# EAGLE board VGA Blinken (EAGLE 7.6.0)
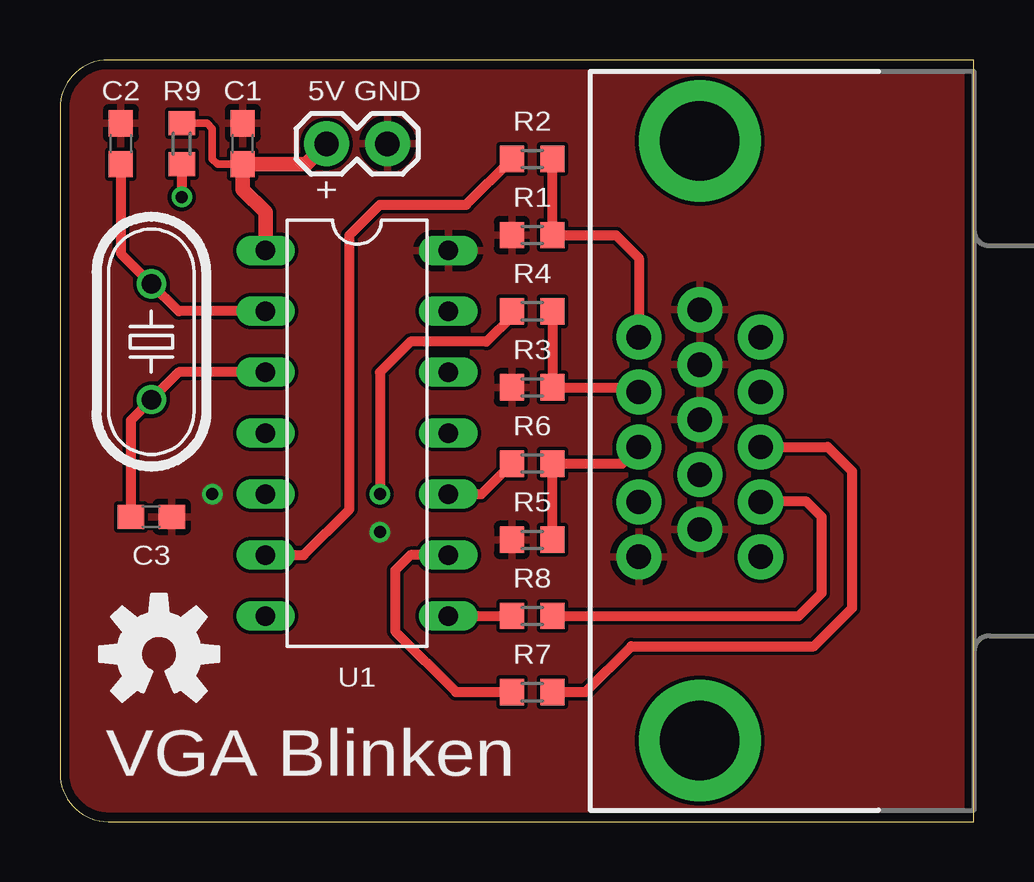
[diagram p0: board, top side]
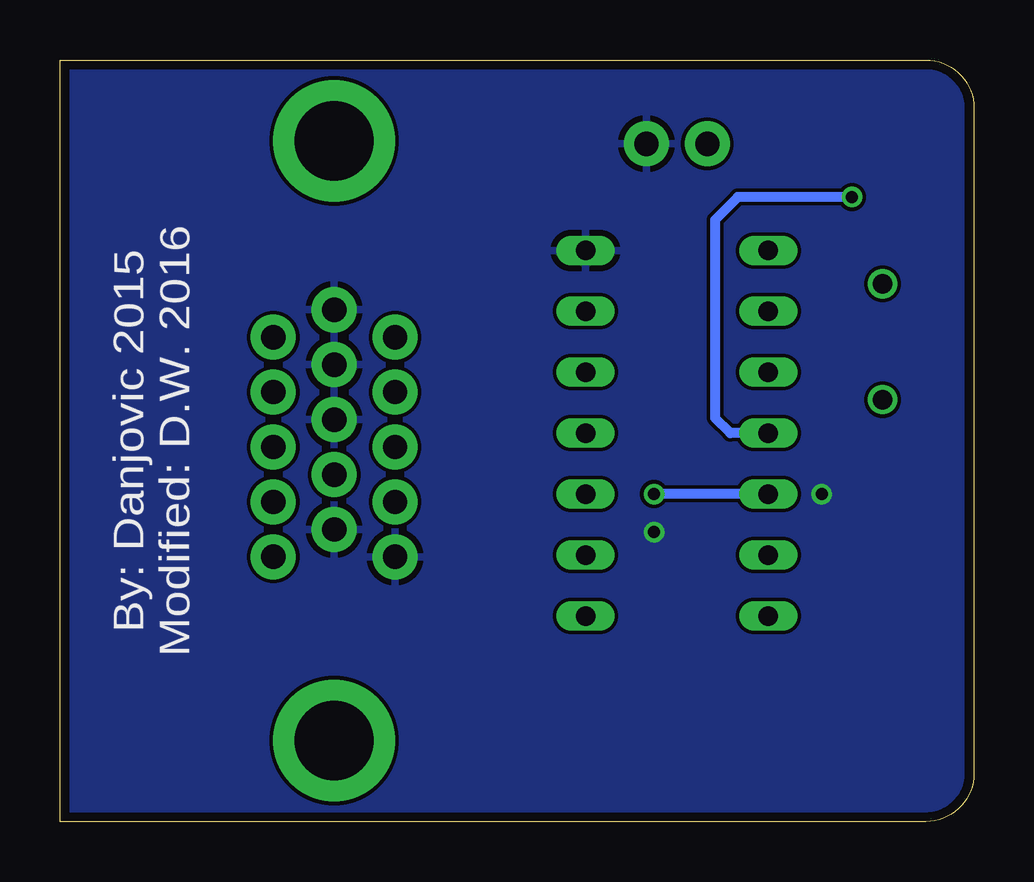
[diagram p1: board, bottom side, seen from below]

Size 38.1 x 31.75 mm. Coordinates in mm from the lower left corner, seen from the top.
Outline: 0,29.75 0,2 arc90 2,0 38.1,0 38.1,31.75 2,31.75 arc90 0,29.75
Copper layers (1*16): Top 0.0356mm / dielectric 1.5011mm / Bottom 0.0356mm
Design rules "OSHPark2layer *": minimum track width 6mil, minimum drill 13mil, track to track 6mil, track to pad 6mil, pad to pad 6mil, via to via 6mil, smd to smd 6mil, copper to edge 15mil, drill to drill 6mil, minimum pad ring 7mil, minimum via ring 7mil, stop-mask expansion 3mil, vias tented up to drill 20mil, thermal gap 10mil

## Footprints (pad centres in the part's own frame; a part is rotated, then mirrored left to right if it is on the bottom)
C0603 = smd 1.1 x 1: 1 -0.85,0; 2 0.85,0
DIL14 = drill 0.813 long: 1 -7.62,-3.81; 2 -5.08,-3.81; 3 -2.54,-3.81; 4 0,-3.81; 5 2.54,-3.81; 6 5.08,-3.81; 7 7.62,-3.81; 8 7.62,3.81; 9 5.08,3.81; 10 2.54,3.81; 11 0,3.81; 12 -2.54,3.81; 13 -5.08,3.81; 14 -7.62,3.81
1X02 = drill 1.016 pad 1.88: 1 0,0; 2 2.54,0
R0603 = smd 1 x 1.1: 1 -0.85,0; 2 0.85,0
DB15 = drill 1.016 pad 1.88: 1 -4.32,-7.62; 2 -2.03,-7.62; 3 0.26,-7.62; 4 2.55,-7.62; 5 4.84,-7.62; 6 -5.46,-5.08; 7 -3.17,-5.08; 8 -0.88,-5.08; 9 1.41,-5.08; 10 3.7,-5.08; 11 -4.32,-2.54; 12 -2.03,-2.54; 13 0.26,-2.54; 14 2.55,-2.54; 15 4.84,-2.54 | drill 3.302 pad 5.08: G1 -12.5,-5.08; G2 12.5,-5.08
HC49U-V = drill 0.813: 1 -2.413,0; 2 2.413,0

## Placement (x,y rotation side)
C1  100nF  [C0603]  7.62,28.26 90 top
C2  22pF  [C0603]  2.54,28.26 90 top
C3  22pF  [C0603]  3.81,12.7 0 top
IC1  PIC16F688  [DIL14]  12.38,16.19 270 top
J1  [1X02]  11.11,28.26 0 top
R1  120  [R0603]  19.68,24.45 0 top
R2  220  [R0603]  19.68,27.62 180 top
R3  120  [R0603]  19.68,18.1 0 top
R4  220  [R0603]  19.68,21.27 180 top
R5  120  [R0603]  19.68,11.75 0 top
R6  220  [R0603]  19.68,14.92 180 top
R7  100  [R0603]  19.68,5.4 180 top
R8  100  [R0603]  19.68,8.57 180 top
R9  10k  [R0603]  5.08,28.26 90 top
U$1  DB15  [DB15]  31.75,15.88 270 top
U$2  [OSHW-LOGO-M]  4.13,6.99 0 top
Y1  20MHz  [HC49U-V]  3.81,20 270 top

## Library data of the parts
C1-C3 R1-R9 = adafruit
IC1 = microchip; MF: MICROCHIP; MPN: PIC16F676-I/P; OC_FARNELL: 9760512; OC_NEWARK: 54K2829
J1 = SparkFun-ConnectorsNEW
U$1 = SparkFun-Connectors
U$2 = SparkFun-Aesthetics
Y1 = SparkFun-FreqCtrl

## Nets
5V: C1.1 IC1.1 J1.1 R9.2
B: IC1.10 R6.2
BLU: R5.2 R6.1 U$1.3
G: IC1.5 R4.2
GND: C1.2 C2.2 C3.2 IC1.14 J1.2 R1.1 R3.1 R5.1 U$1.5 U$1.6 U$1.7 U$1.8 U$1.10
GRN: R3.2 R4.1 U$1.2
HS: IC1.9 R7.2
HSYNC: R7.1 U$1.13
R: IC1.6 R2.2
RED: R1.2 R2.1 U$1.1
RST: IC1.4 R9.1
VS: IC1.8 R8.2
VSYNC: R8.1 U$1.14
X1: C2.1 IC1.2 Y1.1
X2: C3.1 IC1.3 Y1.2

## Tracks (layer width: path | path; a pad name or v marks a point on that pad's centre or on a via)
5V
  Top 0.305: R9.2 6.13,29.11 6.35,28.89 6.35,27.62 6.57,27.41 C1.1
  Top 0.61: J1.1 10.26,27.41 C1.1 7.62,26.35 8.57,25.4 IC1.1
B
  Top 0.406: IC1.10 17.57,13.65 R6.2
BLU
  Top 0.406: U$1.3 23.44,14.92 R6.1 R5.2
G  (via drill 0.5)
  Top 0.406: R4.2 18.84,21.06 17.78,20 14.61,20 13.34,18.73 v13.34,13.65
  Bottom 0.406: IC1.5 v13.34,13.65
GND  (via drill 0.5)
  other vias: 13.34,12.06 6.35,13.65
  pour Top: -0.64,32.38 -0.64,-0.64 45.72,-0.64 45.72,32.38
  pour Bottom: -1.27,33.02 -1.27,-1.27 46.35,-1.27 46.35,33.02
GRN
  Top 0.406: U$1.2 23.94,18.1 R3.2 R4.1
HS
  Top 0.406: IC1.9 14.61,11.11 13.97,10.48 13.97,7.94 16.51,5.4 R7.2
HSYNC
  Top 0.406: R7.1 21.91,5.4 23.81,7.3 31.43,7.3 33.02,8.89 33.02,14.61 32.01,15.62 U$1.13
R
  Top 0.406: IC1.6 10.16,11.11 12.06,13.02 12.06,24.45 13.34,25.72 16.93,25.72 R2.2
RED
  Top 0.406: R2.1 R1.2 23.18,24.45 24.13,23.5 U$1.1
RST  (via drill 0.5)
  Top 0.406: R9.1 v5.08,26.04
  Bottom 0.406: IC1.4 10.16,16.19 10.79,16.83 10.79,25.08 9.84,26.04 v5.08,26.04
VS
  Top 0.406: IC1.8 R8.2
VSYNC
  Top 0.406: R8.1 30.8,8.57 31.75,9.53 31.75,12.7 31.11,13.34 29.22,13.34 U$1.14
X1
  Top 0.406: C2.1 2.54,23.69 Y1.1 4.95,21.27 IC1.2
X2
  Top 0.406: C3.1 2.96,16.74 Y1.2 4.95,18.73 IC1.3

## Text on the board
tNames: C2 | R9 | C1 | 5V | GND | R2 | + | R1 | R4 | R3 | R6 | R5 | C3 | R8 | R7 | U1 | VGA Blinken
bNames: By: Danjovic 2015 / Modified: D.W. 2016